# Altium PCB Volts Sample (SMD).PcbDoc
Units mil, origin at the board's own origin, x right, y up, seen from the top; angles counter-clockwise.
Board outline 2100 x 1000 mil, 2 copper layers (Top Layer, Bottom Layer); 25 components, 19 nets, 72 pads, 10 vias.
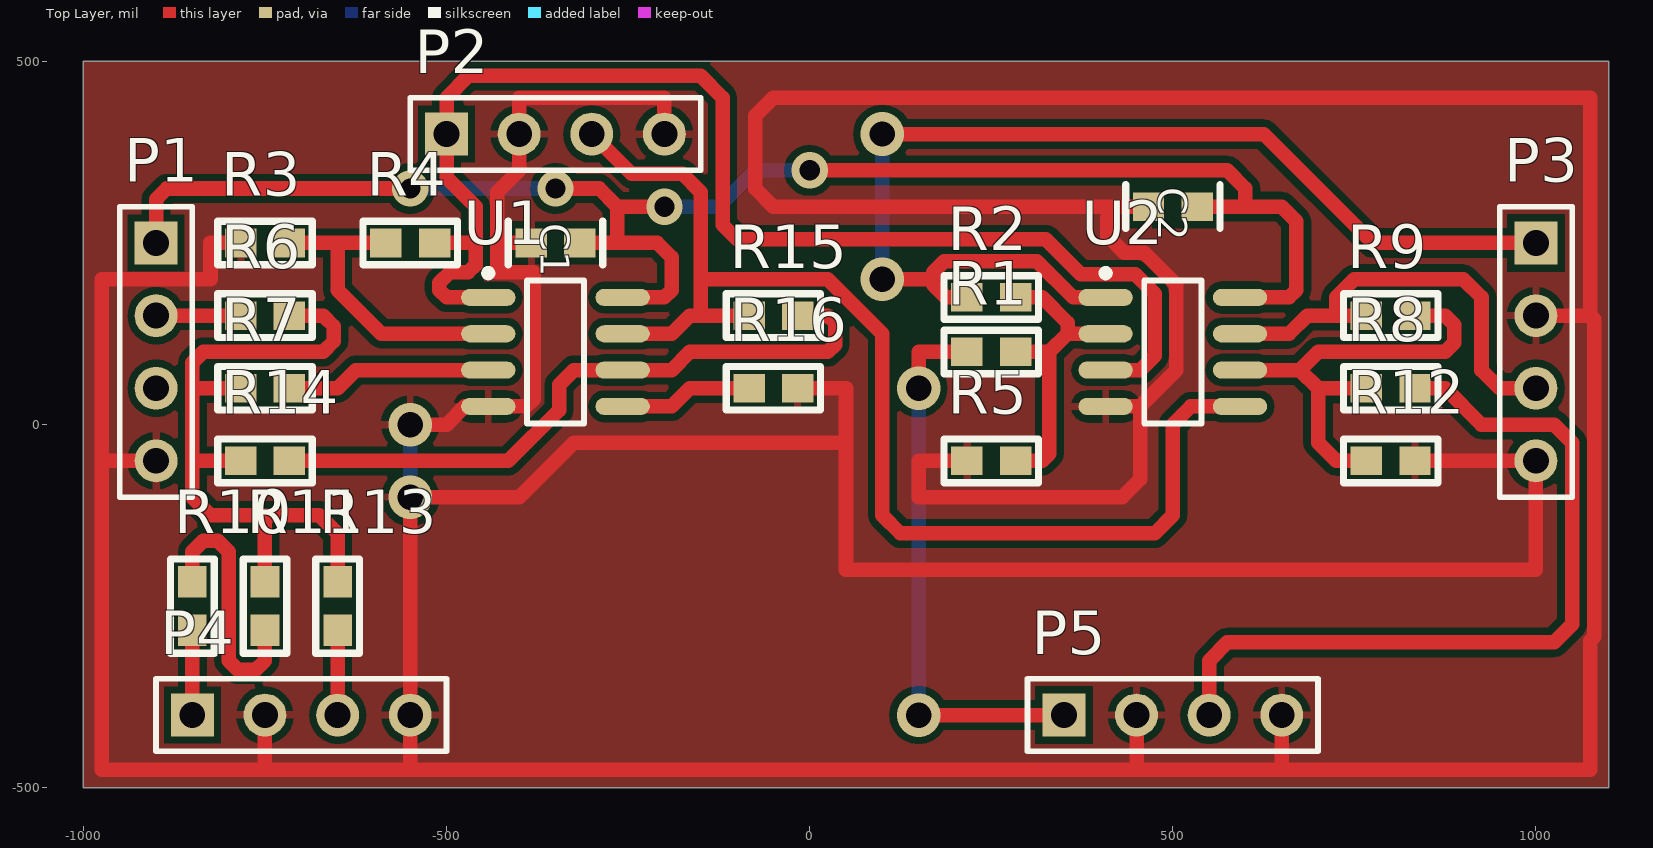
[diagram p0: Top Layer view]
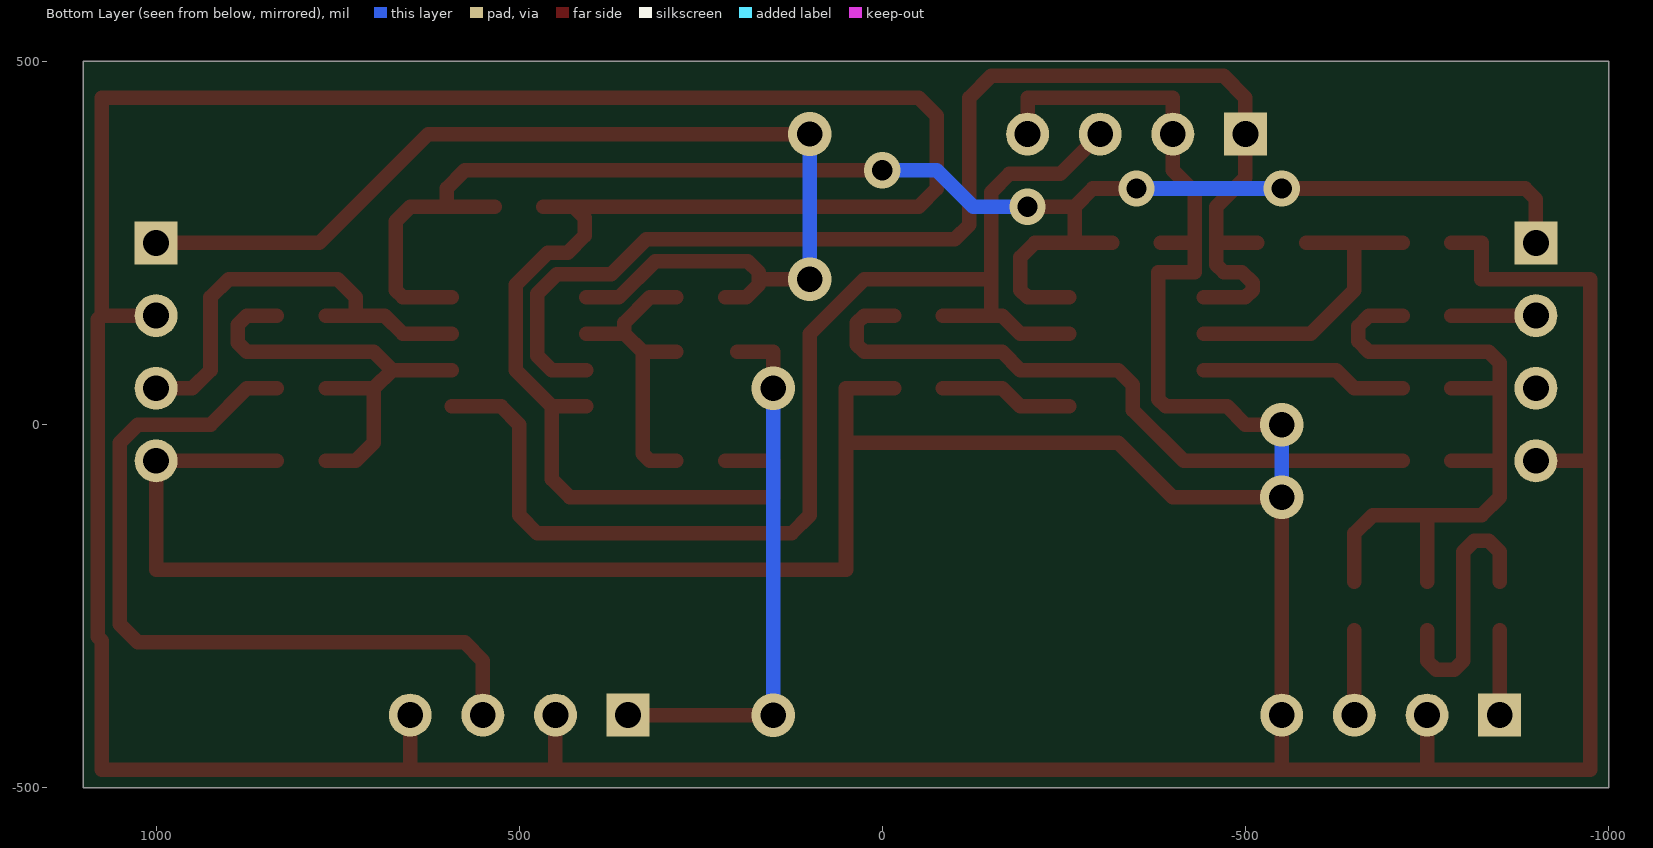
[diagram p1: Bottom Layer view, seen from below]

## Layer stack, top to bottom
Top Layer: signal copper 1.4
Dielectric: dielectric 12.6, FR-4, Dk 4.8
Bottom Layer: signal copper 1.4

## Board outline
-1000,-500 -1000,500 1100,500 1100,-500

## Design rules (kind name [scope] priority, off if disabled: settings)
Clearance [All] p1: gap=10
PolygonConnect [All] p1: connectstyle=Relief reliefconductorwidth=10 reliefentries=4 polygonreliefangle="90 Angle" airgapwidth=10
RoutingVias [All] p1: holewidth=35 width=60 viastyle="Through Hole" minholewidth=28 minwidth=50 maxholewidth=200 maxwidth=250
SolderMaskExpansion [All] p1: expansion=4
Width [All] p1: maxlimit=1000 minlimit=10 preferedwidth=10
28 further rules are at their usual default settings.

## Components (designator, comment, footprint, x,y, rotation, side; value= is the part's Value field where it differs from the comment)
C1 "100nF" "CAP (3D) - 0603" -350,250 r0 top
C2 "100nF" "CAP (3D) - 0603" 500,300 r0 top
P1 "Header 4" HDR1X4 -900,250 r270 top
P2 "Header 4" HDR1X4 -500,400 r0 top
P3 "Header 4" HDR1X4 1000,250 r270 top
P4 "Header 4" HDR1X4 -850,-400 r0 top
P5 "Header 4" HDR1X4 350,-400 r0 top
R1 "10k" "RES (3D) - 0603" 250,100 r180 top
R2 "100k" "RES (3D) - 0603" 250,175 r0 top
R3 "10k" "RES (3D) - 0603" -750,250 r180 top
R4 "59k" "RES (3D) - 0603" -550,250 r180 top
R5 "100k" "RES (3D) - 0603" 250,-50 r180 top
R6 "10M" "RES (3D) - 0603" -750,150 r180 top
R7 "10k" "RES (3D) - 0603" -750,50 r180 top
R8 "10k" "RES (3D) - 0603" 800,50 r0 top
R9 "100k" "RES (3D) - 0603" 800,150 r0 top
R10 "1M" "RES (3D) - 0603" -850,-250 r270 top
R11 "100K" "RES (3D) - 0603" -750,-250 r270 top
R12 "100k" "RES (3D) - 0603" 800,-50 r0 top
R13 "40k" "RES (3D) - 0603" -650,-250 r270 top
R14 "10k" "RES (3D) - 0603" -750,-50 r180 top
R15 "39k" "RES (3D) - 0603" -50,150 r0 top
R16 "10k" "RES (3D) - 0603" -50,50 r0 top
U1 "MCP6L02" SO-8 -350,100 r0 top
U2 "MCP6L02" SO-8 500,100 r0 top

## Footprints (in the part's own frame and the unit in brackets; to place one, negate y for a bottom-side part, rotate by r counter-clockwise, add the part's x,y. Pads: shape width x height; smd on the part's side, far side on the other; paste and mask are expansions set on the pad)
"CAP (3D) - 0603" [mm]
  rect 1.1x1 smd: 1(0.85,0) 2(-0.85,0)
  silkscreen extent -1.65,-0.76 1.65,0.76, body extent -1,-0.39 1,0.39, height 0.79
HDR1X4 [mm] "Connector; Header; 4 Position"
  rect 1.5x1.5 hole 0.9: 1(0,0)
  round 1.5 hole 0.9: 2(2.54,0) 3(5.08,0) 4(7.62,0)
  silkscreen extent -1.27,-1.27 8.89,1.27
"RES (3D) - 0603" [mm]
  rect 1.1x1 smd: 1(0.85,0) 2(-0.85,0)
  silkscreen extent -1.65,-0.76 1.65,0.76, body extent -0.8,-0.4 0.8,0.4, height 0.92
SO-8 [mm] "SOIC, 8-Leads, Body 4.9x3.9mm, Pitch 1.27mm, IPC High Density"
  oval 1.9x0.6 smd: 1(-2.35,1.905) 2(-2.35,0.635) 3(-2.35,-0.635) 4(-2.35,-1.905) 5(2.35,-1.905) 6(2.35,-0.635) 7(2.35,0.635) 8(2.35,1.905)
  silkscreen extent -2.47,-2.5 1,2.88, body extent -2.9,-2.45 3.1,2.45, height 1.75

## Part data
C1 C2: library part CAP, "CAPACITOR SMD 0603"
P1 P2 P3 P4 P5: "Header, 4-Pin"
R1 R3 R7 R8 R14 R16: library part "RES SMD 0603 10k", "RESISTOR SMD 0603 10k"
R2 R4 R5 R6 R9 R10 R11 R12 R13 R15: library part "RES SMD 0603 39k", "RESISTOR SMD 0603 39k"

## Via types
v1: diameter 60, hole 35, Top Layer to Bottom Layer, 6 vias
v2: diameter 50, hole 28, Top Layer to Bottom Layer, 4 vias

## Nets (pads, with @x,y where several pads share a name; then routed paths per layer and width w, separated by ;. In a path a pad name is that pad's centre, name@x,y a point inside that pad or via, vN(x,y) a via of type N, cw(c..) or ccw(c..) an arc to the next point about the centre after c; other vN are vias at no path point)
GND: C1.2 C2.2 P1.4 P2.2 P2.4 P3.2 P3.4 P4.2 P4.4 P5.2 P5.4 R3.1 R5.1 R12.1 R16.1 U1.4 U2.4 | length 10667.3
  Top Layer w20: P1.4 -975,-50 ; R3.1 -825,250 -825,200 -975,200 -975,-50 ; P4.2 -750,-475 ; v1(-550,0) -500,0 -475,25 U1.4 -390,25 -380,35 -380,210 -430,210 -430,250 ; C1.2 -430,250 ; P2.4 -200,450 -400,450 P2.2 -400,350 -430,320 -430,250 ; R16.1 50,50 50,-25 ; R5.1 150,-50 150,-100 430,-100 455,-75 455,25 ; U2.4 455,25 ; P5.2 450,-475 ; C2.2 425,300 ; P5.4 650,-475 ; R12.1 P3.4 1000,-200 50,-200 50,-25 ; P3.2 1075,150 ; -975,-50 -975,-475 -750,-475 ; -750,-475 -550,-475 ; -550,-475 450,-475 ; -550,-475 P4.4 v1(-550,-100) -400,-100 -325,-25 50,-25 ; 425,300 -50,300 -75,325 -75,425 -50,450 1075,450 1075,150 ; 425,300 410,285 410,260 433.19,236.81 460.62,236.81 505,192.43 505,75 455,25 ; 450,-475 650,-475 ; 650,-475 1075,-475 1075,-297.43 1080,-292.43 1080,145 1075,150
  Bottom Layer w20: v1(-550,-100) v1(-550,0)
K0_1: P5.1 R1.1 | length 750
  Top Layer w20: v1(150,-400) P5.1 ; v1(150,50) 150,100 R1.1@200,100
  Bottom Layer w20: v1(150,-400) v1(150,50)
K0_2: P5.3 R8.1 | length 1093.3
  Top Layer w20: P5.3 550,-325 575,-300 1025,-300 1050,-275 1050,-25 1025,0 925,0 875,50 R8.1
NetP4_1: P4.1 R10.1 | length 116.5
  Top Layer w20: P4.1 R10.1
NetP4_3: P4.3 R13.1 | length 116.5
  Top Layer w20: P4.3 R13.1
NetR1_2: R1.2 R2.1 R5.2 U2.2 | length 426.2
  Top Layer w20: R5.2 320,-50 330,-40 330,100 ; R1.2 330,100 ; R2.1 320.15,175 355,140.15 355,125 ; U2.2 355,125 ; 330,100 355,125
NetR3_2: R3.2 R4.1 U1.2 | length 430.4
  Top Layer w20: R3.2 -650,250 ; R4.1 -650,250 ; U1.2 -590,125 -650,185 -650,250
NetR6_2: R6.2 R7.1 R11.2 R13.2 R14.1 | length 994.1
  Top Layer w20: R14.1 -850,-50 ; R7.1 -845,50 -850,55 ; R11.2 -750,-125 ; R6.2 -670,150 -655,135 -655,115 -670,100 -835,100 -850,85 -850,55 ; R13.2 -650,-150 -675,-125 -750,-125 ; -850,-50 -850,55 ; -850,-50 -850,-100 -825,-125 -750,-125
NetR7_2: R7.2 U1.3 | length 284.4
  Top Layer w20: R7.2 -650,50 -625,75 U1.3
NetR8_2: R8.2 R9.1 R12.2 U2.6 | length 648.5
  Top Layer w20: U2.6 675,75 ; R12.2 725,-50 700,-25 700,50 ; R8.2 700,50 ; R9.1 875,150 887.5,137.5 887.5,112.5 875,100 700,100 675,75 ; 675,75 700,50
NetR10_2: R10.2 R11.1 | length 355.9
  Top Layer w20: R10.2 -850,-175 -835,-160 -815,-160 -800,-175 -800,-325 -787.5,-337.5 -762.5,-337.5 -750,-325 R11.1
NetR14_2: R14.2 R15.1 U1.6 | length 924
  Top Layer w20: R14.2 -415,-50 -345,20 -345,55 -325,75 U1.6 -190,75 -165,100 25,100 35,110 35,140 25,150 R15.1
NetR16_2: R16.2 U1.5 | length 184.4
  Top Layer w20: U1.5 -190,25 -165,50 R16.2
V+: P2.1 R4.2 U1.1 U2.3 | length 1820.1
  Top Layer w20: R4.2 -460,250 ; U1.1 -500,175 -510,185 -510,195 -495,210 -470,210 -460,220 -460,250 ; U2.3 455,75 475,95 475,180 448.19,206.81 373.19,206.81 325,255 -100,255 -120,275 -120,450 -150,480 -470,480 -500,450 P2.1 -500,340 -460,300 -460,250
V-: P2.3 R15.2 U1.7 U2.5 | length 1717.2
  Top Layer w20: P2.3 -245,345 -175,345 -150,320 -150,200 ; U1.7 -190,125 -165,150 -150,150 ; R15.2 -150,150 ; U2.5 525,25 500,0 500,-125 475,-150 125,-150 100,-125 100,125 25,200 -150,200 ; -150,150 -150,200
VCC: C1.1 C2.1 P1.1 U1.8 U2.8 | length 2255.5
  Top Layer w20: P1.1 -900,310 -885,325 v2(-550,325) ; v2(-350,325) -290,325 -265,300 ; C1.1 -265,250 ; U1.8 -200,175 -190,185 -190,230 -210,250 -265,250 ; v2(-200,300) -265,300 ; v2(0,350) 575,350 600,325 600,300 ; C2.1 600,300 ; U2.8 660,175 670,185 670,280 650,300 600,300 ; -265,250 -265,300
  Bottom Layer w20: v2(-550,325) v2(-350,325) ; v2(-200,300) -125,300 -75,350 v2(0,350)
VIN: P1.2 R6.1 | length 116.5
  Top Layer w20: P1.2 R6.1
VOUT+: P3.1 R2.2 U2.1 | length 1568.9
  Top Layer w20: v1(100,200) 167.5,200 170,197.5 ; v1(100,400) 625,400 775,250 P3.1 ; R2.2 187.5,175 170,192.5 170,197.5 ; U2.1 362.57,175 312.57,225 185,225 170,210 170,197.5
  Bottom Layer w20: v1(100,200) v1(100,400)
VOUT-: P3.3 R9.2 U2.7 | length 615.4
  Top Layer w20: U2.7 660,125 685,150 725,150 ; R9.2 725,150 ; P3.3 950,50 925,75 925,175 900,200 750,200 725,175 725,150
pads on no net: P1.3

## Polygon pours and split planes (outlines as drawn)
GND on Top Layer "Mechanical 1-No Net" (solid, remove dead copper): -1000,-500 -1000,500 1100,500 1100,-500

## Silkscreen, mask and mechanical layers (free items; w line width, h text height)
Mechanical 1:
  lines w10: -1000,-500 -1000,500 1050,500 1100,500 1100,-500 -1000,-500